# Altium PCB esp32-watch.PcbDoc
Units mil, origin at the board's own origin, x right, y up, seen from the top; angles counter-clockwise.
Board outline 1563.97 x 1611.96 mil, 4 copper layers (Top Layer, power, GND, Bottom Layer), stack 23.756 mil thick; 44 components, 28 nets, 174 pads, 123 vias.
Unrouted connection lines stored in the file: 28.
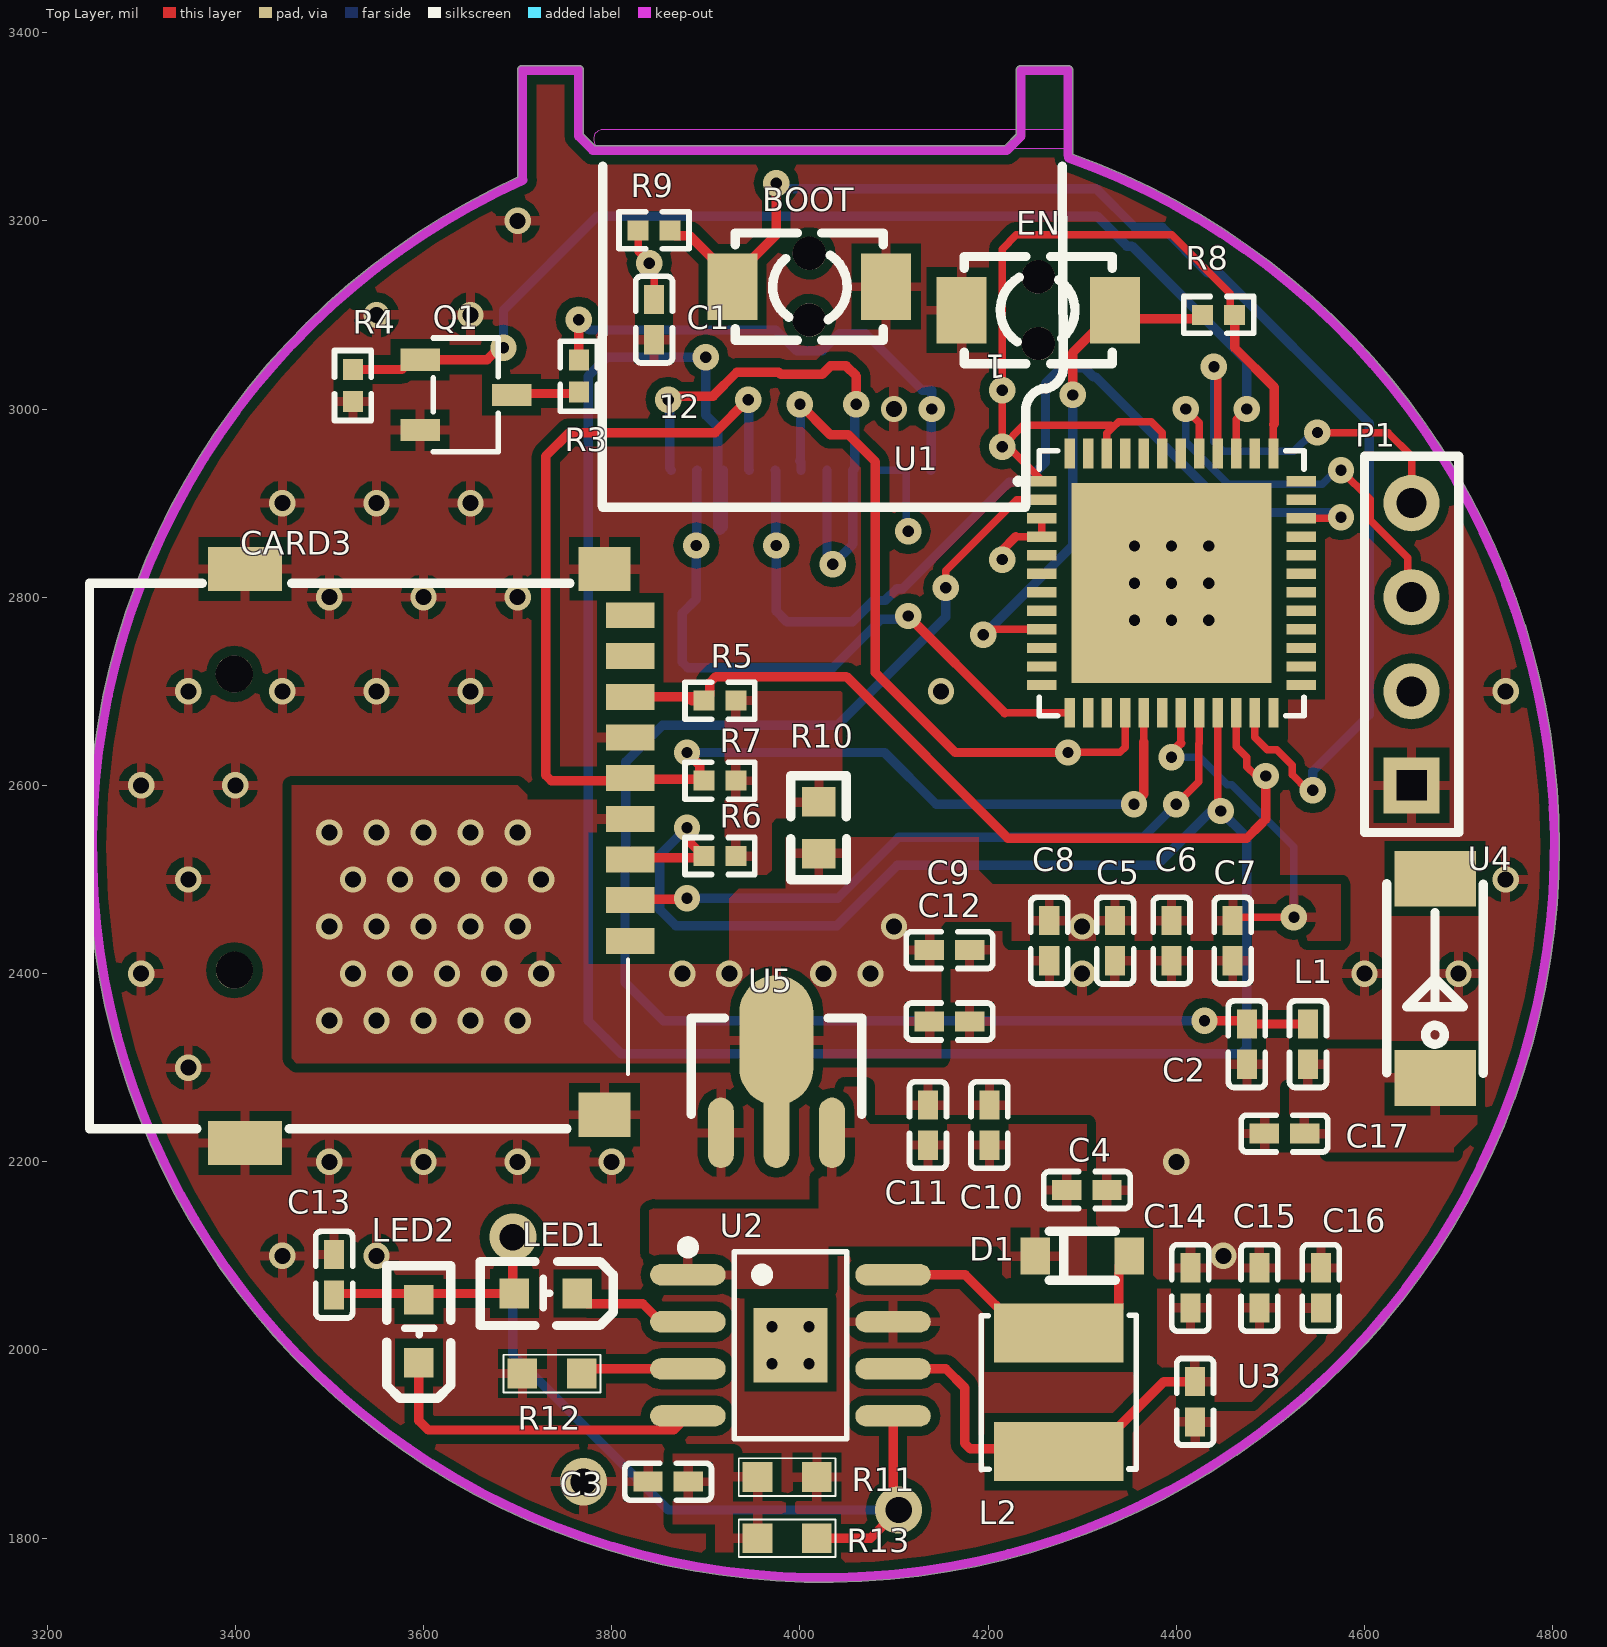
[diagram p0: Top Layer view]
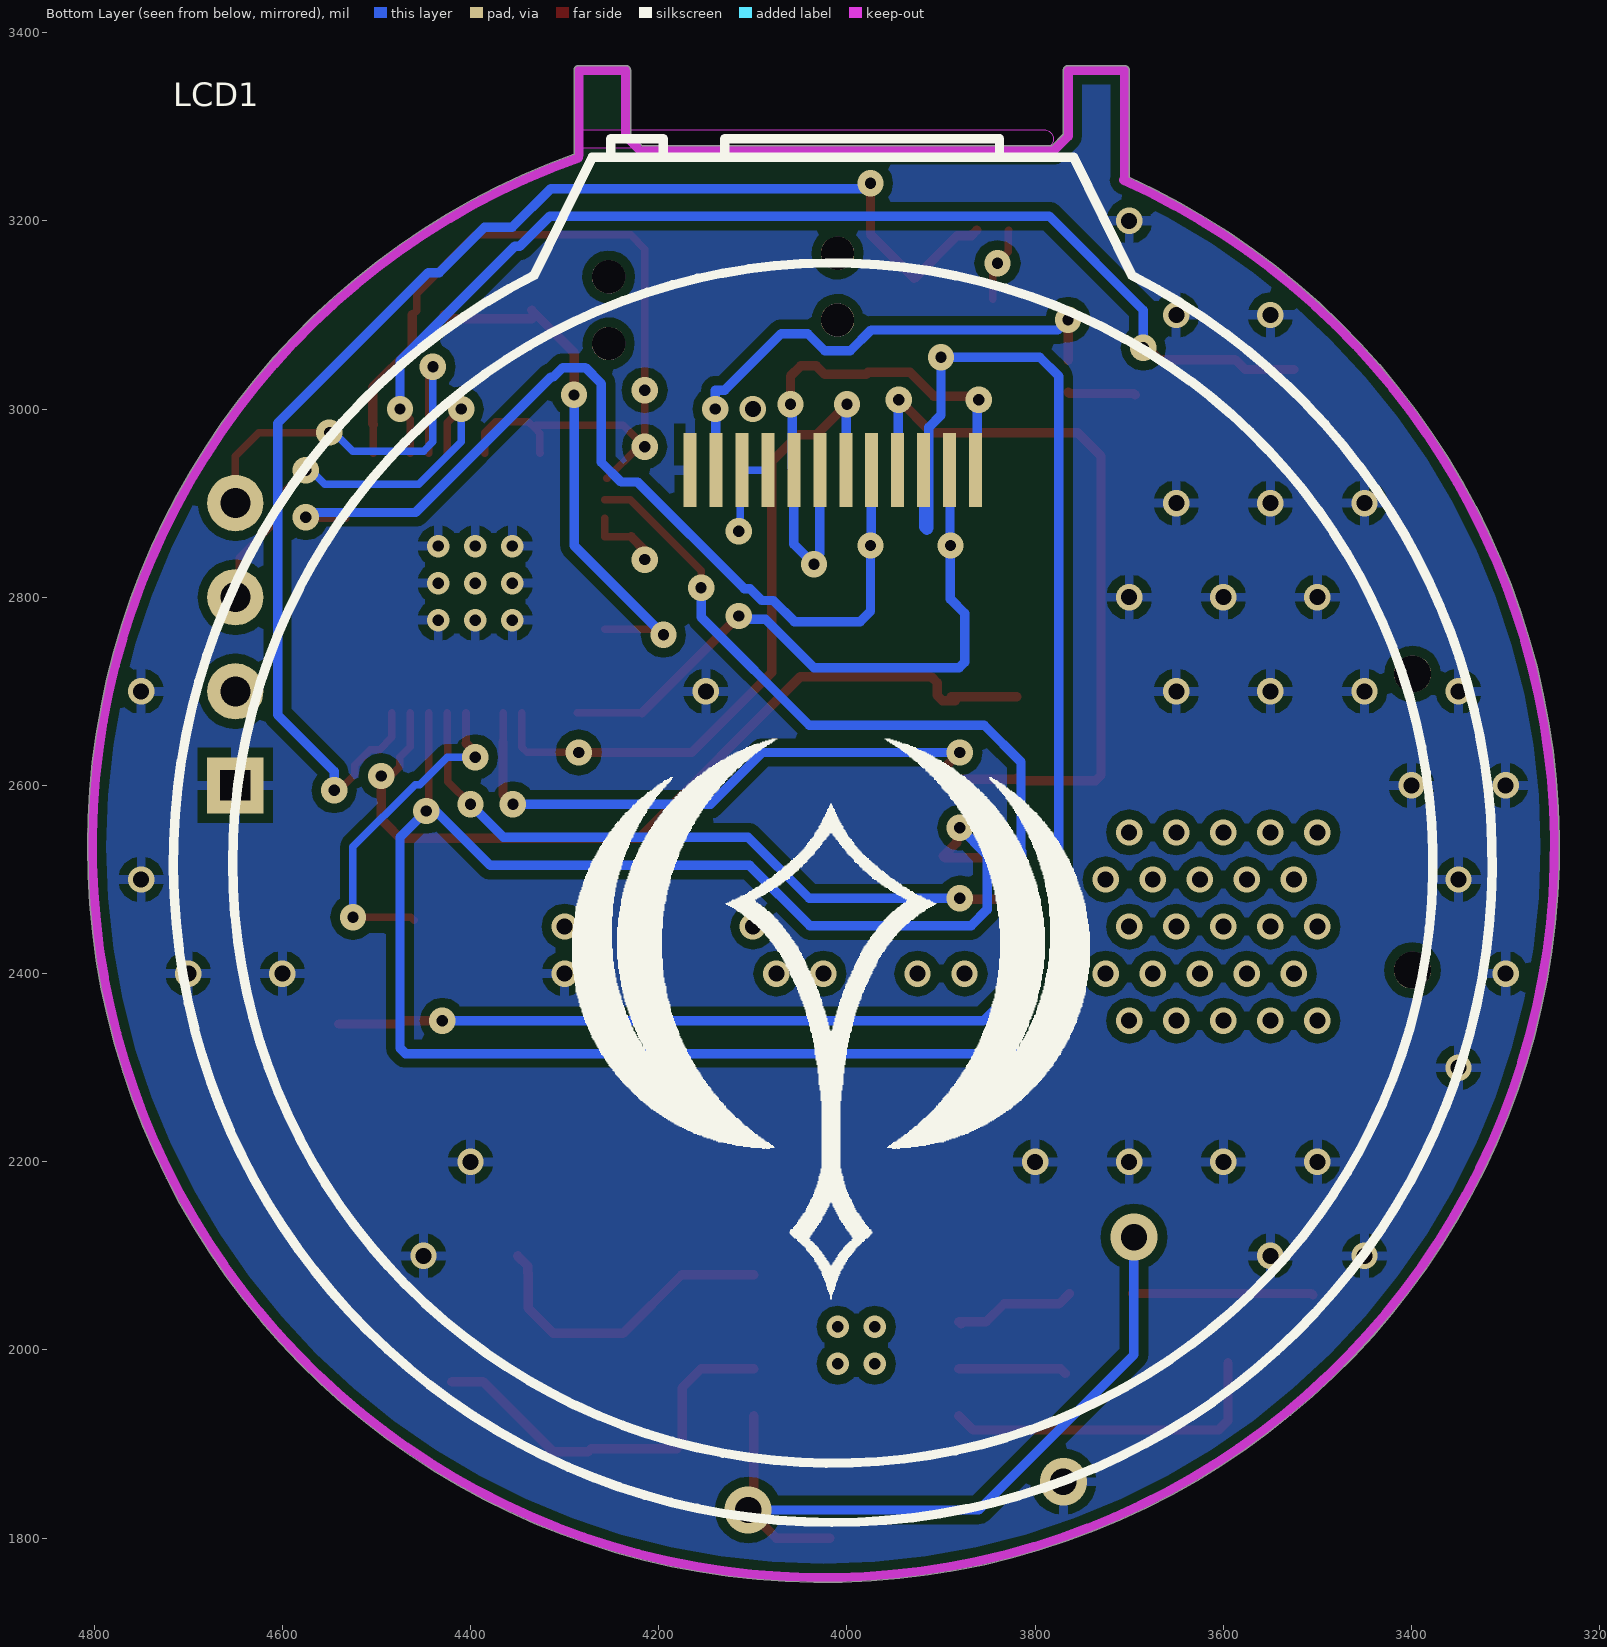
[diagram p1: Bottom Layer view, seen from below]
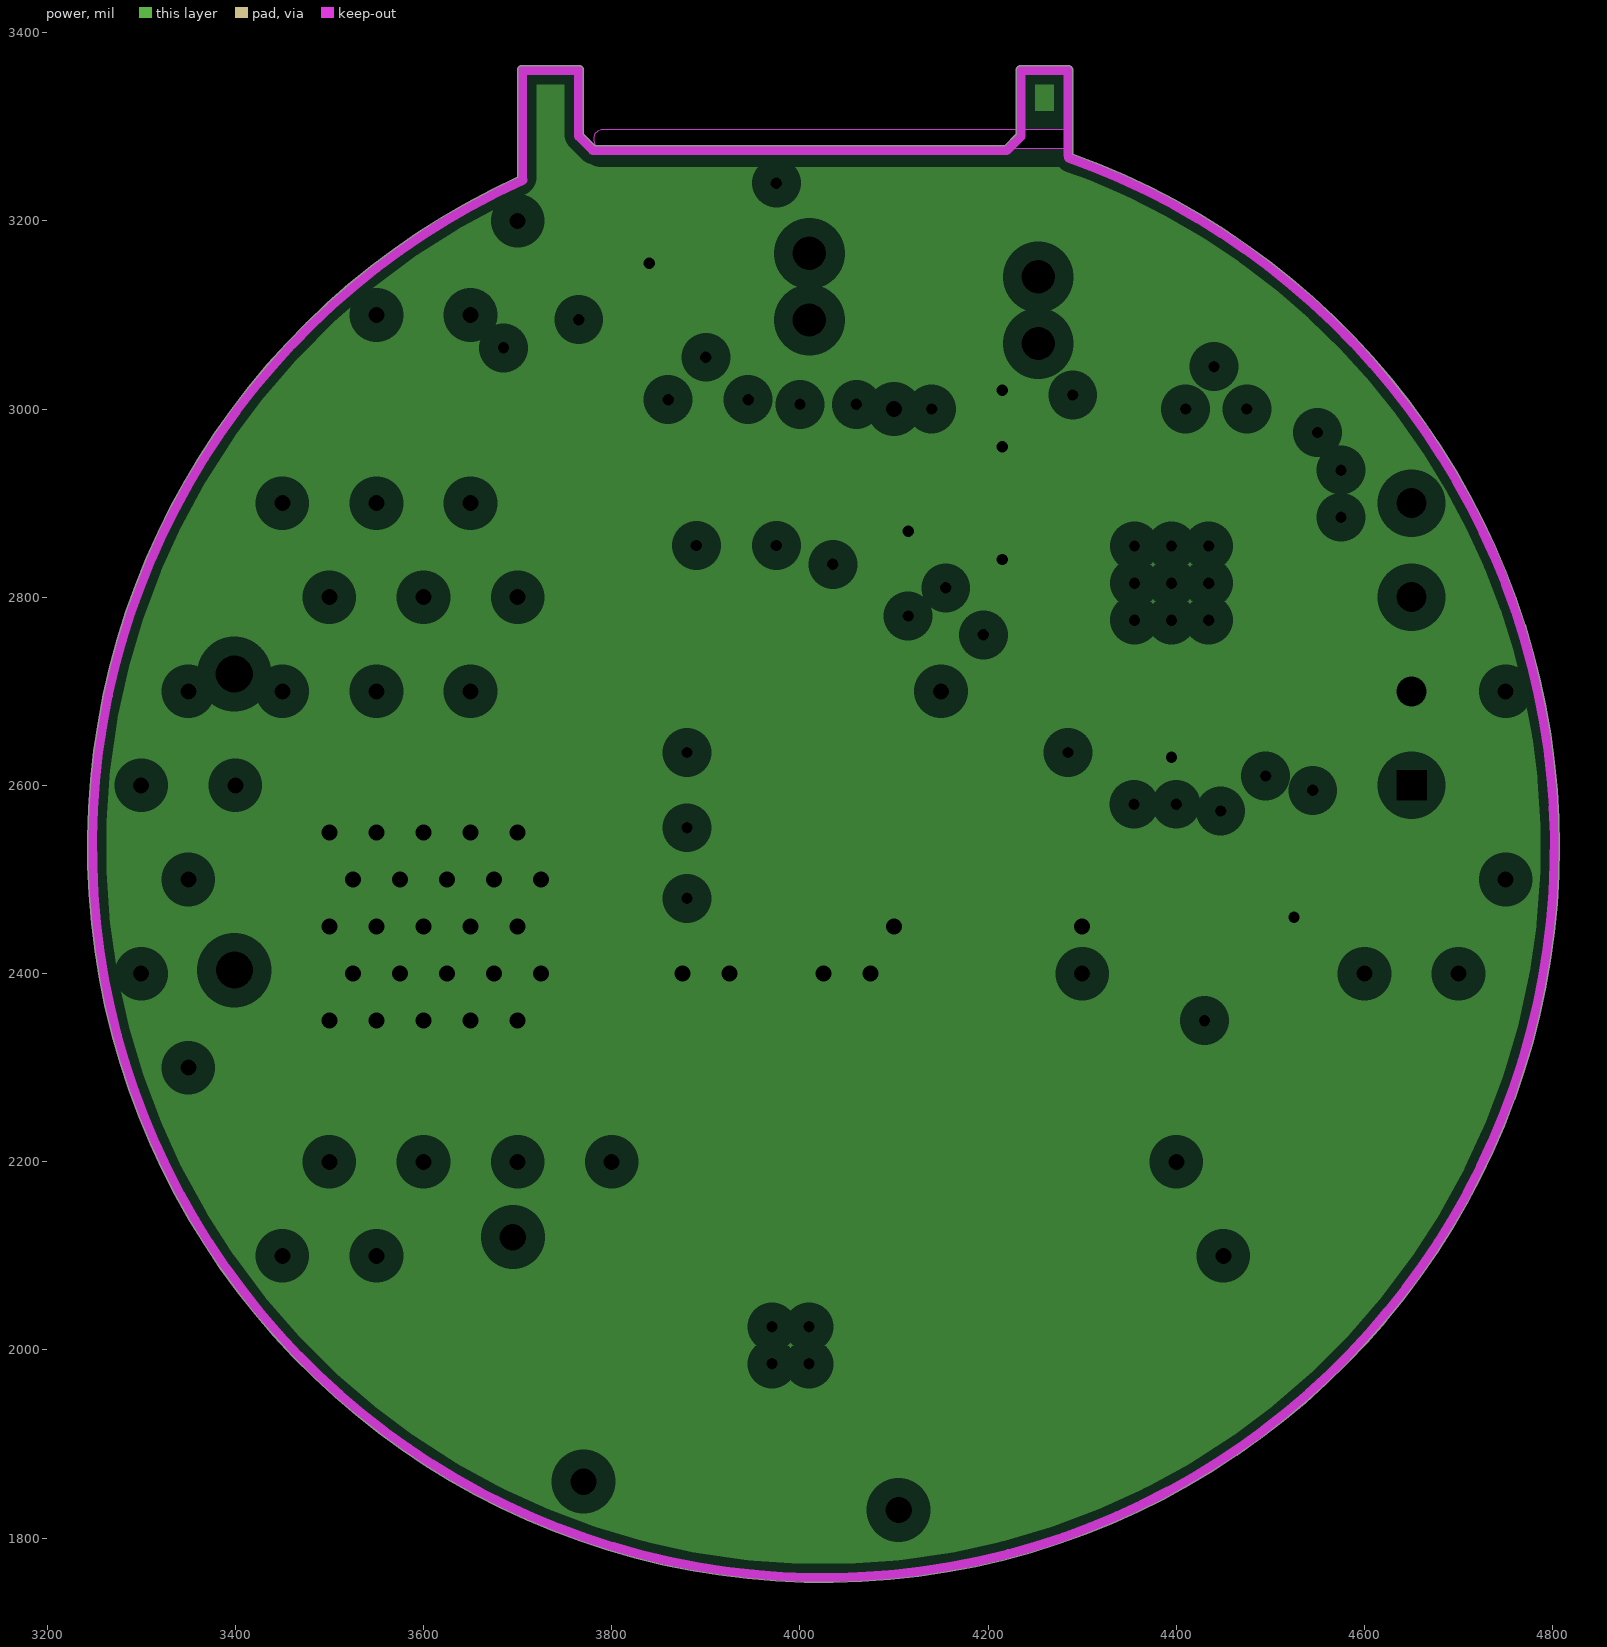
[diagram p2: power, clearances drawn from the general rule]
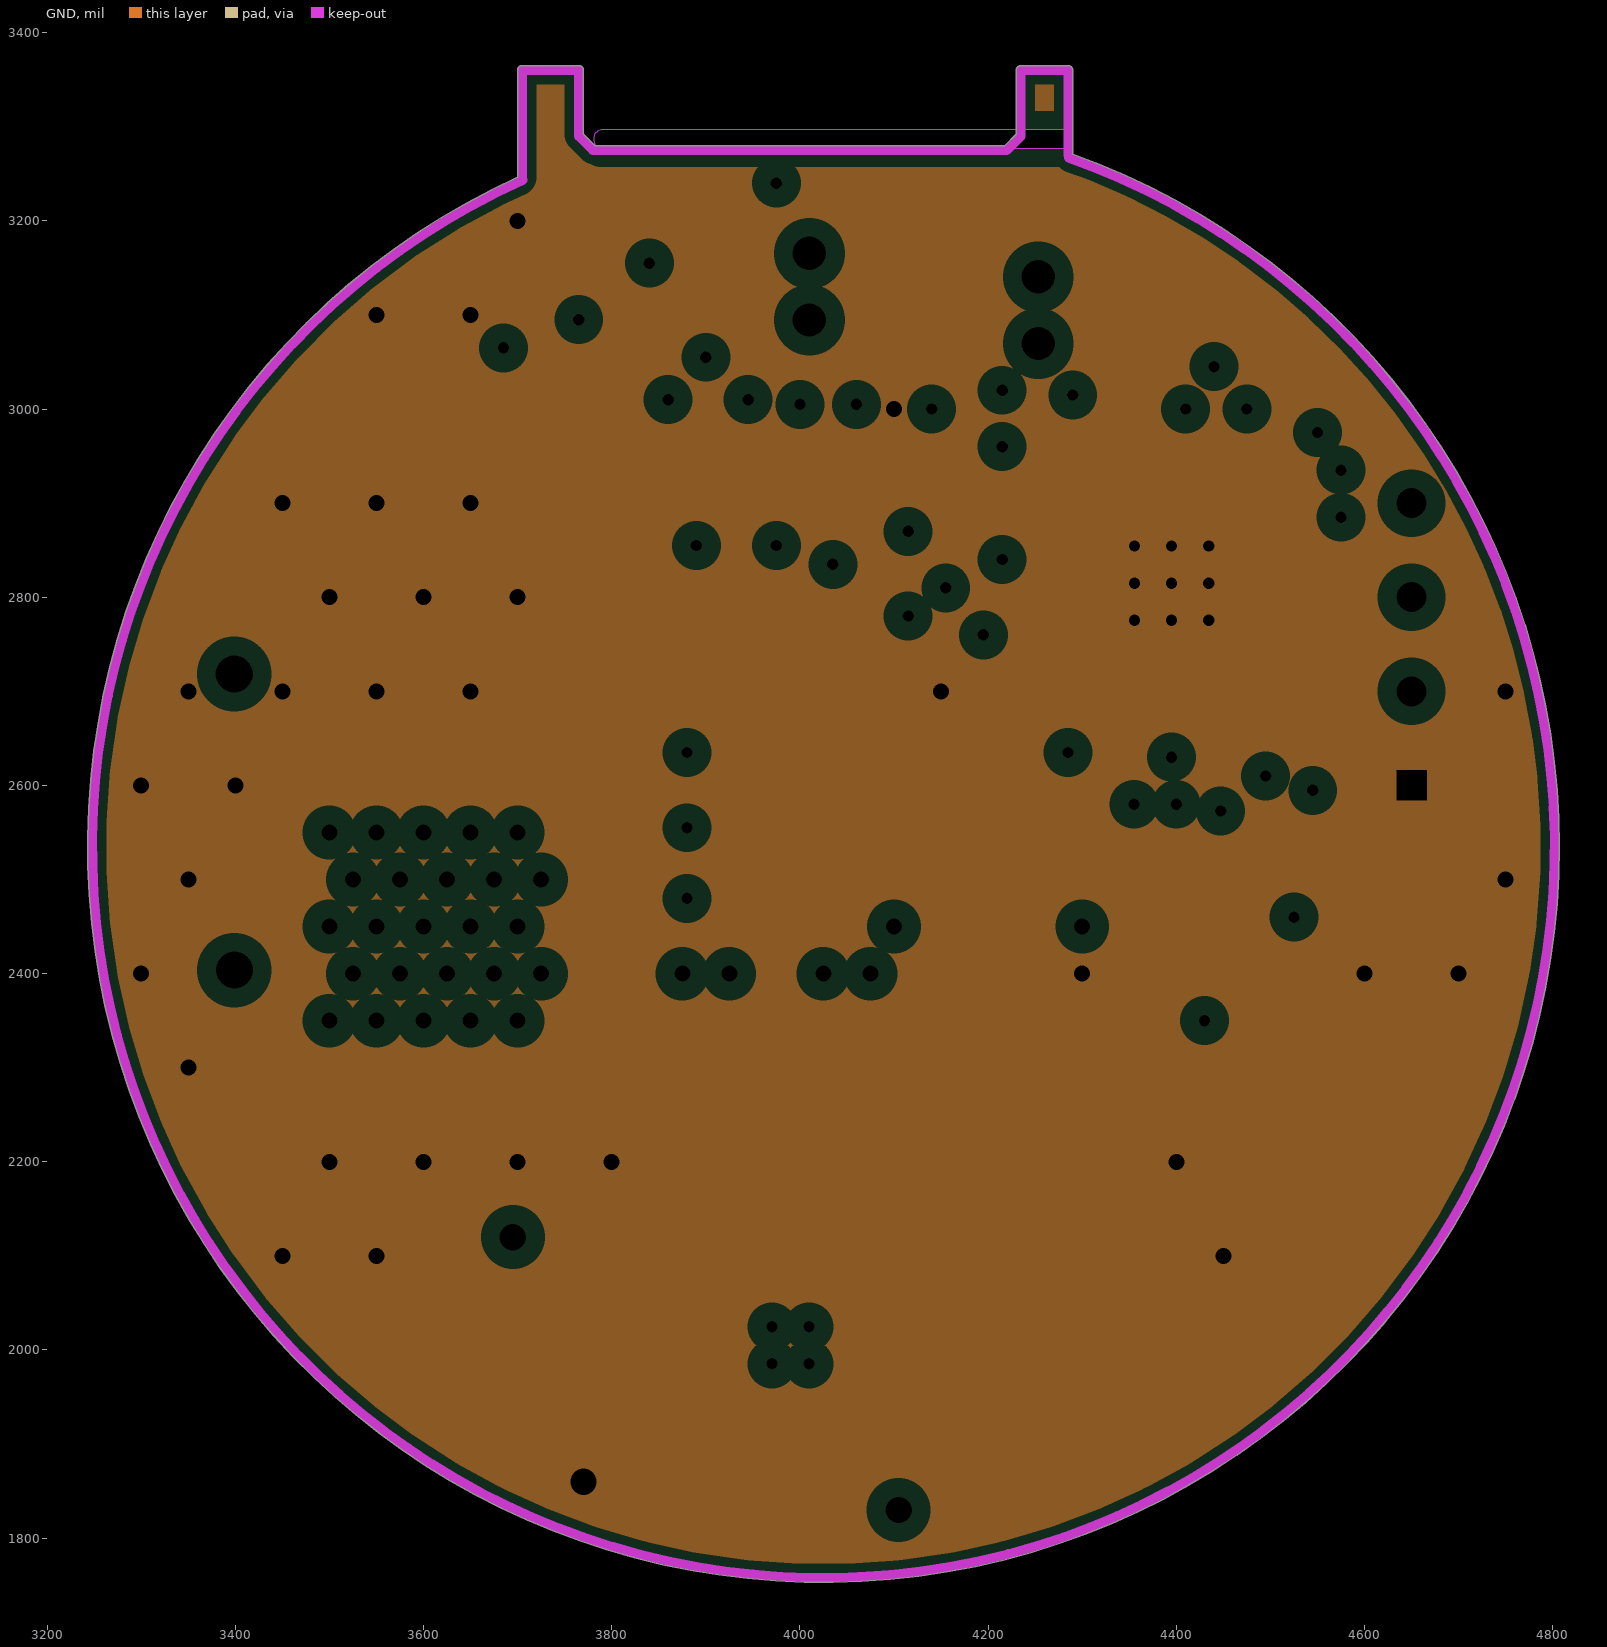
[diagram p3: GND, clearances drawn from the general rule]

## Layer stack, top to bottom
Top Solder: solder mask 0.4, Solder Resist, Dk 3.5
Top Layer: signal copper 1.4
Dielectric 2: prepreg 2.8, PP-006, Dk 4.1
power: plane copper 1.378, net 3.3V
Dielectric 1: dielectric 12.6, FR-4, Dk 4.8
GND: plane copper 1.378, net GND
Dielectric 3: prepreg 2.8, PP-006, Dk 4.1
Bottom Layer: signal copper 1.4
Bottom Solder: solder mask 0.4, Solder Resist, Dk 3.5

## Board outline
3699.99,3246.28 3699.99,3360 cw(c3705,3360) 3705,3365.01 3765,3365.01 cw(c3765,3360) 3770.01,3360 3770.01,3292.08 3782.08,3280.01 4217.92,3280.01 4229.98,3292.08 4229.98,3360 cw(c4235,3360) 4235,3365.01 4285,3365.01 cw(c4285,3360) 4290.02,3360 4290.02,3270.74 cw(c4025,2535) 4807.02,2535 cw(c4025,2535)

## Design rules (kind name [scope] priority, off if disabled: settings)
Clearance [All] p1: gap=10 ignorepadtopadclearanceinfootprint=TRUE except(0: Arc-Hole Track-Hole SMDPad-Hole THPad-Hole Via-Hole Fill-Hole Poly-Hole Region-Hole Text-Hole)
PlaneClearance [All] p1: clearance=20
PlaneConnect [All] p1: planeconnectstyle=Relief reliefexpansion=20 reliefentries=4 reliefconductorwidth=10 reliefairgap=10
PolygonConnect [All] p1: connectstyle=Relief reliefconductorwidth=10 reliefentries=4 polygonreliefangle="90 Angle" airgapwidth=10
RoutingVias [All] p1: holewidth=28 width=50 viastyle="Through Hole" minholewidth=28 minwidth=50 maxholewidth=28 maxwidth=50
SolderMaskExpansion [All] p1: expansion=4
Width [All] p1: maxlimit=50 minlimit=5 preferedwidth=8
28 further rules are at their usual default settings.

## Components (designator, comment, footprint, x,y, rotation, side; value= is the part's Value field where it differs from the comment)
BOOT "SW2" SW-SMD_L4.0-W2.9-P4.15-EH 4010,3130 r0 top
C1 "100nF" C0402 3845,3095 r270 top
C2 "2pF" C0402 4475,2325 r90 top
C3 "C0402" C0402 3860,1860 r0 top value=0.1UF
C4 "100NF" C0402 4305,2170 r180 top
C5 "100nf" C0402 4335,2435 r90 top
C6 "10nf" C0402 4395,2435 r90 top
C7 "100nf" C0402 4460,2435 r90 top
C8 "100nf" C0402 4265,2435 r90 top
C9 "C0402" C0402 4159.01,2425 r180 top value=10uf
C10 "C0402" C0402 4201.42,2239.01 r270 top value=0.1UF
C11 "C0402" C0402 4136.16,2239.01 r270 top value=10uf
C12 "C0402" C0402 4159.01,2349.1 r180 top value=0.1UF
C13 "C0603" C0402 3505,2080 r270 top
C14 "100NF" C0402 4415,2065.99 r90 top
C15 "22UF" C0402 4488.37,2065.99 r90 top
C16 "22UF" C0402 4553.63,2065.99 r90 top
C17 "2pF" C0402 4515,2230 r0 top
CARD3 "TF-01A" TF-SMD_TF-01A 3615,2525 r90 top
D1 "1N5819" SOD-323 4300,2100 r0 top
EN "SW1" SW-SMD_L4.0-W2.9-P4.15-EH 4253.31,3105 r180 top
L1 "2.4nH" C0402 4540,2325 r270 top
L2 "10uH" IND-SMD_L4.0-W4.0 4275,1955 r90 top
LCD1 "TFT_1.28_GC9A01_CB1.6" TFT_1.28_GC9A01_CB0.8 4015,2517.44 r0 bottom
LED1 "BLUE" LED0603-R-RD 3730,2060 r180 top
LED2 "BLUE" LED0603-R-RD 3595,2020 r90 top
P1 "2.54-1*4P_JX" 2.54-1*4P_TIGHT_JX 4650,2750 r90 top
Q1 "AO3400A" SOT-23-3_L2.9-W1.6-P1.90-LS2.8-BR 3645,3015 r0 top
R3 "10Ω" R0402 3765,3035 r270 top
R4 "10K" R0402 3525,3025 r270 top
R5 "10K" R0402 3915,2690 r180 top
R6 "10K" R0402 3915,2525 r180 top
R7 "10K" R0402 3915,2605 r180 top
R8 "12K" R0402 4445,3100 r0 top
R9 "12K" R0402 3845,3190 r0 top
R10 "0Ω" R0603 4020,2555 r270 top
R11 "R0603" R_0603 4017.99,1865 r180 top value=无?
R12 "R0603" R_0603 3705,1975 r0 top value=2K
R13 "R0603" R_0603 3955,1800 r0 top value=0.3R
U1 "ESP32-PICO-D4" QFN-48_L7.0-W7.0-P0.50-BL-EP5.4 4395,2814.99 r270 top
U2 "TP5400" SOIC-8_L5.0-W4.0-P1.27-LS6.0-BL-EP2.0 3990,2005 r270 top
U3 "BAT" C0402 4420,1945 r270 top
U4 "CA-C03" ANT2051 4675,2395 r90 top
U5 "AMS1117-3.3_C347256" SOT-89_L4.5-W2.5-P1.50-LS4.2-BR 3975,2280 r270 top

## Footprints (in the part's own frame and the unit in brackets; to place one, negate y for a bottom-side part, rotate by r counter-clockwise, add the part's x,y. Pads: shape width x height; smd on the part's side, far side on the other; paste and mask are expansions set on the pad)
2.54-1*4P_TIGHT_JX [mm]
  rect 1.52x1.52 hole 0.81 square: 1(-3.81,0)
  round 1.52 hole 0.81: 2(-1.27,0) 3(1.27,0) 4(3.81,0)
  silkscreen extent -5.08,-1.27 5.08,1.27
ANT2051 [mm]
  rect 1.5x2.2 smd: 1(-2.69,0) 2(2.69,0)
  silkscreen extent -2.56,-1.3 2.55,1.3
C0402 [mm]
  rect 0.79x0.54 smd: 1(-0.545,0) 2(0.545,0)
  silkscreen extent -1.17,-0.5 1.17,0.5
IND-SMD_L4.0-W4.0 [mm]
  rect 1.6x3.5 smd: 1(-1.6,0) 2(1.6,0)
  silkscreen extent -2.08,-2.1 2.08,2.1
LED0603-R-RD [mm]
  rect 0.8x0.8 smd: 1(0.851,0) 2(-0.851,0)
  silkscreen extent -1.82,-0.86 1.77,0.86
QFN-48_L7.0-W7.0-P0.50-BL-EP5.4 [mm]
  rect 0.28x0.8 smd: 1(-2.75,-3.5) 2(-2.25,-3.5) 3(-1.75,-3.5) 4(-1.25,-3.5) 5(-0.75,-3.5) 6(-0.25,-3.5) 7(0.25,-3.5) 8(0.75,-3.5) 9(1.25,-3.5) 10(1.75,-3.5) 11(2.25,-3.5) 12(2.75,-3.5) 25(2.75,3.5) 26(2.25,3.5) 27(1.75,3.5) 28(1.25,3.5) 29(0.75,3.5) 30(0.25,3.5) 31(-0.25,3.5) 32(-0.75,3.5) 33(-1.25,3.5) 34(-1.75,3.5) 35(-2.25,3.5) 36(-2.75,3.5)
  rect 0.8x0.28 smd: 13(3.5,-2.75) 14(3.5,-2.25) 15(3.5,-1.75) 16(3.5,-1.25) 17(3.5,-0.75) 18(3.5,-0.25) 19(3.5,0.25) 20(3.5,0.75) 21(3.5,1.25) 22(3.5,1.75) 23(3.5,2.25) 24(3.5,2.75) 37(-3.5,2.75) 38(-3.5,2.25) 39(-3.5,1.75) 40(-3.5,1.25) 41(-3.5,0.75) 42(-3.5,0.25) 43(-3.5,-0.25) 44(-3.5,-0.75) 45(-3.5,-1.25) 46(-3.5,-1.75) 47(-3.5,-2.25) 48(-3.5,-2.75)
  rect 5.4x5.4 smd: 49(0,0)
  silkscreen extent -3.58,-4.21 3.58,3.58
R0402 [mm]
  rect 0.566x0.54 smd: 1(-0.433,0) 2(0.433,0)
  silkscreen extent -0.94,-0.5 0.94,0.5
R0603 [mm]
  rect 0.8x0.9 smd: 1(0.7,0) 2(-0.7,0)
  silkscreen extent -1.4,-0.76 1.4,0.75
R_0603 [mm]
  rect 0.8x0.8 smd: 1(0,0) 2(1.6,0)
  silkscreen extent -0.51,-0.51 2.11,0.51
SOD-323 [mm]
  rect 0.8x1 smd: 1(1.27,0) 2(-1.27,0)
  silkscreen extent -0.89,-0.66 0.89,0.66
SOIC-8_L5.0-W4.0-P1.27-LS6.0-BL-EP2.0 [mm]
  oval 0.574x2.038 smd: 1(-1.905,-2.769) 2(-0.635,-2.769) 3(0.635,-2.769) 4(1.905,-2.769) 5(1.905,2.769) 6(0.635,2.769) 7(-0.635,2.769) 8(-1.905,2.769)
  rect 2x2 smd: 9(0,0)
  silkscreen extent -2.79,-2.92 2.53,1.52
SOT-23-3_L2.9-W1.6-P1.90-LS2.8-BR [mm]
  rect 1.07x0.6 smd: 1(-1.235,0.95) 2(-1.235,-0.95) 3(1.235,0)
  silkscreen extent -0.88,-1.54 0.88,1.54
SOT-89_L4.5-W2.5-P1.50-LS4.2-BR [mm]
  oval 1.9x0.7 smd: 1(1.25,-1.5) 3(1.25,1.5)
  oval 3.5x2 smd: 2(-1.25,0)
  oval 2.1x0.7 smd: 2(1.151,0)
  silkscreen extent -1.85,-2.3 0.75,2.3
SW-SMD_L4.0-W2.9-P4.15-EH [mm]
  rect 1.35x1.8 smd: 1(2.075,0) 2(-2.075,0)
  round 0.9 hole 0.9 unplated: ""(0,-0.9) ""(0,0.9)
  silkscreen extent -2,-1.45 2,1.45
TF-SMD_TF-01A [mm]
  rect 0.7x1.3 smd: 1(-2.292,-5.2) 2(-1.192,-5.198) 3(-0.096,-5.2) 4(1.004,-5.2) 5(2.103,-5.2) 6(3.201,-5.2) 7(4.297,-5.2) 8(5.395,-5.2) 9(6.499,-5.2)
  rect 1.2x1.397 smd: 10(7.747,-4.502) 13(-6.985,-4.502)
  rect 1.2x2 smd: 11(7.747,5.2) 12(-7.747,5.2)
  round 1 hole 1 unplated: ""(-3.084,5.487) ""(4.915,5.49)
  silkscreen extent -7.37,-5.14 7.37,9.4
TFT_1.28_GC9A01_CB0.8 [mm]
  rect 0.35x2 smd: 1(3.85,-10.61) 2(3.15,-10.61) 3(2.45,-10.61) 4(1.75,-10.61) 5(1.05,-10.61) 6(0.35,-10.61) 7(-0.35,-10.61) 8(-1.05,-10.61) 9(-1.75,-10.61) 10(-2.45,-10.61) 11(-3.15,-10.61) 12(-3.85,-10.61)
  Keep-Out Layer board cut-out: -5.7,-19.3 6.7,-19.3 6.75,-19.3 6.842,-19.338 6.912,-19.408 6.95,-19.5 6.95,-19.6 6.912,-19.692 6.842,-19.762 6.75,-19.8 6.7,-19.8 6.7,-19.8 -5.7,-19.8 -5.75,-19.8 -5.842,-19.762 -5.912,-19.692 -5.95,-19.6 -5.95,-19.5 -5.912,-19.408 -5.842,-19.338 -5.75,-19.3 -5.7,-19.3 -5.7,-19.3
  silkscreen extent -17.8,-19.56 17.8,17.8

## Part data
BOOT EN: BOM_JLCPCB Part Class="Extended Part", BOM_Manufacturer=BRIGHT, BOM_Manufacturer Part=TSA343G00D-250J2, BOM_Supplier=LCSC, BOM_Supplier Part=C354947, Contributor=LCSC, spicePre=S, spiceSymbolName=TSA343G00D-250J2
C1: BOM_JLCPCB Part Class="Extended Part", BOM_Manufacturer=YAGEO, BOM_Manufacturer Part=CC0402KRX5R9BB104, BOM_Supplier=LCSC, BOM_Supplier Part=C105882, nameAlias=Capacitance, spicePre=C, spiceSymbolName=CC0402KRX5R9BB104
C4 C14 C15 C16: library part C0805, "Capacitor"
C5 C7 C8: library part 10uF, BOM_JLCPCB Part Class="Basic Part", BOM_Manufacturer=SAMSUNG, BOM_Manufacturer Part=CL05A106MQ5NUNC, BOM_Supplier=LCSC, BOM_Supplier Part=C15525, nameAlias=Capacitance, spicePre=C, spiceSymbolName=CL05A106MQ5NUNC
C6: library part 10uF, BOM_JLCPCB Part Class="Basic Part", BOM_Manufacturer=SAMSUNG, BOM_Manufacturer Part=CL05A106MQ5NUNC, Package Display=No, BOM_Supplier=LCSC, BOM_Supplier Part=C15525, nameAlias=Capacitance, spicePre=C, spiceSymbolName=CL05A106MQ5NUNC
C13: BOM_Manufacturer="Samsung Electro-Mechanics", BOM_Manufacturer Part=10uF, BOM_Supplier=LCSC, BOM_Supplier Part=C15415, Contributor=LCSC, nameAlias=Value, spicePre=C, spiceSymbolName=10UF
CARD3: BOM_JLCPCB Part Class="Extended Part", BOM_Manufacturer=HRO, BOM_Manufacturer Part=TF-01A, BOM_Supplier=LCSC, BOM_Supplier Part=C91145, spicePre=C, spiceSymbolName=TF-01A
D1: "肖特基二极管"
L2: BOM_JLCPCB Part Class="Extended Part", BOM_Manufacturer=Sunlord, BOM_Manufacturer Part=SWPA4030S100MT, BOM_Supplier=LCSC, BOM_Supplier Part=C38117, nameAlias=Inductance, spicePre=L, spiceSymbolName=SWPA4030S100MT
LED1 LED2: library part LED_B
Q1: BOM_JLCPCB Part Class="Basic Part", BOM_Manufacturer=AOS, BOM_Manufacturer Part=AO3400A, BOM_Supplier=LCSC, BOM_Supplier Part=C20917, spicePre=Q, spiceSymbolName=AO3400A
R3: BOM_JLCPCB Part Class="Basic Part", BOM_Manufacturer=UniOhm, BOM_Manufacturer Part=0402WGF100JTCE, Resistance (Ohms)=10, BOM_Supplier=LCSC, BOM_Supplier Part=C25077, nameAlias=Resistance, spicePre=R, spiceSymbolName=0402WGF100JTCE
R4 R5 R6 R7: BOM_JLCPCB Part Class="Basic Part", BOM_Manufacturer=UniOhm, BOM_Manufacturer Part=0402WGF1002TCE, BOM_Supplier=LCSC, BOM_Supplier Part=C25744, nameAlias="Resistance (Ohms)", spicePre=R, spiceSymbolName=0402WGF1002TCE
R8 R9: BOM_JLCPCB Part Class="Extended Part", BOM_Manufacturer=YAGEO, BOM_Manufacturer Part=AC0402JR-0712KL, Resistance=12kΩ, BOM_Supplier=LCSC, BOM_Supplier Part=C227297, Contributor=LCSC, nameAlias="Resistance (Ohms)", spicePre=R, spiceSymbolName=AC0402JR-0712KL
R10: BOM_JLCPCB Part Class="Extended Part", BOM_Manufacturer=UniOhm, BOM_Manufacturer Part=0603WAJ0000T5E, Resistance (Ohms)=0, BOM_Supplier=LCSC, BOM_Supplier Part=C15402, nameAlias=Resistance, spicePre=R, spiceSymbolName=0603WAJ0000T5E
U1: BOM_JLCPCB Part Class="Extended Part", BOM_Manufacturer="Espressif Systems", Package Display=No, BOM_Manufacturer Part=ESP32-PICO-D4, BOM_Supplier=LCSC, BOM_Supplier Part=C193707, Contributor=LCSC, spicePre=U, spiceSymbolName=ESP32-PICO-D4
U2: "锂电池充放电", BOM_JLCPCB Part Class="Extended Part", BOM_Manufacturer=TOPPOWER, BOM_Manufacturer Part=TP5400, BOM_Supplier=LCSC, BOM_Supplier Part=C24154, spicePre=U, spiceSymbolName=TP5400
U5: BOM_JLCPCB Part Class="Extended Part", BOM_Manufacturer="Youtai Semiconductor Co., Ltd.", BOM_Manufacturer Part=AMS1117-3.3, BOM_Supplier=LCSC, BOM_Supplier Part=C347256, Contributor=LCSC, spicePre=U, spiceSymbolName=AMS1117-3.3_C347256
C2 C17: Contributor=LCEDA_Lib, nameAlias=Value(F), spicePre=C, spiceSymbolName=C_0402_US
C3 C9 C10 C11 C12: PCB DECAL=CAP_0603_FIRE
L1: Contributor=LCEDA_Lib, nameAlias=Value(H), spicePre=L, spiceSymbolName=L0402_US
LCD1: Contributor=启?, spicePre=L, spiceSymbolName=TFT_1.28_GC9A01_CB1.6
P1: BOM_Supplier=LCSC, BOM_Supplier Part=C115245, spicePre=P, spiceSymbolName=2.54-1*4P_JX
R11 R12 R13: PCB DECAL=R_0603
U4: Contributor=BVREAVE, link=https://item.taobao.com/item.htm?spm=a230r.1.14.4.81c453c0MSMjjx&id=627328734225&ns=1&abbucket=1#detail, spicePre=U, spiceSymbolName=ANT_CrossAir_CA-C03

## Via types
v1: diameter 28, hole 17, Top Layer to Bottom Layer, 68 vias
v2: diameter 28, hole 12, Top Layer to Bottom Layer, 39 vias
v3: diameter 24.02, hole 12, Top Layer to Bottom Layer, 9 vias
v4: diameter 24, hole 12, Top Layer to Bottom Layer, 4 vias
v5: diameter 50, hole 28, Top Layer to Bottom Layer, 3 vias

## Nets (pads, with @x,y where several pads share a name; then routed paths per layer and width w, separated by ;. In a path a pad name is that pad's centre, name@x,y a point inside that pad or via, vN(x,y) a via of type N, cw(c..) or ccw(c..) an arc to the next point about the centre after c; other vN are vias at no path point)
3.3V: C1.1 C5.2 C6.2 C7.2 C8.2 C9.2 C12.2 CARD3.4 LCD1.3 LCD1.4 P1.2 R8.2 R9.1 R10.1 U1.1 U1.3 U1.4 U1.19 U1.37 U1.43 U1.46 U5.2 | length 1582.5
  Top Layer w8: R9.1 3828.37,3189.59 3828.37,3167.37 3845,3150.74 C1.1 ; v2@4221.28,2960 U1.1@4255,2926.28 ; 4229.2,2864.2 U1.4 U1.3 ; U1.46 4326.28,2952.97 4326.28,2974.34 4332.46,2980.51 ; U1.43 4384.99,2952.97 4384.99,2975.01 4373.31,2986.69 4338.63,2986.69 4332.46,2980.51 ; 4404.85,2644.72 U1.19 ; C7.2 4463.54,2460 v2(4525,2460) ; R8.2 4457.37,3104.67 4457.37,3122.63 4395,3185 4230,3185 4215,3170 v2(4215,3020) v2(4215,2960) 4237.54,2982.54 4330.43,2982.54 4332.46,2980.51 ; U1.37 4503.27,2983.53
  Top Layer w10: v2(4215,2840) 4215,2850 4229.2,2864.2 ; v2(4215,2960) v2@4221.28,2960 ; v2(4395,2630) 4395,2634.87 4404.85,2644.72 ; R8.2 4462.04,3065.23 4504,3023.27 4504,2984.26 4503.27,2983.53
  Bottom Layer w8: LCD1.4 LCD1.3 4113.23,2933.38 4113.23,2871.77 v2(4115,2870) ; v2(4395,2630) 4425,2630 4454.11,2600.89 4458.71,2600.89 4525,2534.6 v2(4525,2460)
  other v1: 3500,2350 3550,2350 3600,2350 3650,2350 3700,2350 3700,2350 3525,2400 3575,2400 3625,2400 3675,2400 3725,2400 3875,2400 3925,2400 4025,2400 4025,2400 4075,2400 4075,2400 3500,2450 3550,2450 3600,2450 3650,2450 3700,2450 4100,2450 4300,2450 4300,2450 3525,2500 3575,2500 3625,2500 3675,2500 3725,2500 3500,2550 3550,2550 3600,2550 3650,2550 3700,2550
  other v2: 3840,3155
5V: C3.2 R11.2 R13.1
+5.0V: C4.2 C10.2 C11.2 D1.2 U2.1 U5.3
GND: BOOT.1 C1.2 C2.1 C3.1 C4.1 C5.1 C6.1 C7.1 C8.1 C9.1 C10.1 C11.1 C12.1 C13.1 C14.2 C15.2 C16.2 C17.1 CARD3.6 CARD3.10 CARD3.11 CARD3.12 CARD3.13 EN.1 LCD1.1 P1.1 Q1.2 R4.2 R11.1 R12.1 U1.49 U2.7 U3.2 U5.1
  other v1: 3450,2100 3550,2100 4450,2100 3500,2200 3600,2200 3700,2200 3800,2200 4400,2200 3350,2300 3300,2400 4300,2400 4600,2400 4700,2400 3350,2500 4750,2500 3300,2600 3400,2600 3350,2700 3450,2700 3550,2700 3650,2700 4150,2700 4750,2700 3500,2800 3600,2800 3700,2800 3450,2900 3550,2900 3650,2900 4100,3000 3550,3100 3650,3100 3700,3200
  other v3: 4355.62,2775.63 4395,2775.63 4434.37,2775.62 4355.62,2815 4395,2815 4434.37,2815 4355.62,2854.37 4395,2854.37 4434.37,2854.36
  other v5: 3770,1860
NetBOOT_2: BOOT.2 R9.2 U1.23 | length 1480.6
  Top Layer w8: U1.23 4483.59,2651.01 4496.6,2638 4506.6,2638 4523,2621.6 4523,2611.6 4539.8,2594.8 v2(4545,2594.8)
  Top Layer w10: R9.2 3867.67,3184.37 3882.79,3184.37 3928.31,3138.86 3975,3185.55 v2(3975,3240) ; v2(4545,2594.8) v2@4550.2,2594.8
  Bottom Layer w10: v2(3975,3240) 3980.7,3234.3 4314.66,3234.3 4355.8,3193.15 4385.14,3193.15 4433.28,3145 4445,3145 4605.08,2984.92 4605.08,2675.08 4545,2615 v2(4545,2594.8)
NetC2_2: C2.2 L1.1 U1.2 | length 1565.2
  Top Layer w8: v2(4155,2810) 4155,2828.29 4230.29,2903.57 U1.2
  Top Layer w10: v2(4430,2350) 4471.46,2350 C2.2 L1.1
  Bottom Layer w10: v2(4155,2810) 4155,2778.99 4040.01,2664 3854,2664 3815,2625 3815,2531.01 3814.14,2530.15 3814.14,2390.86 3855,2350 v2(4430,2350)
NetC13_2: C13.2 LED1.1 LED2.1 R13.2 U2.5 | length 1053
  Top Layer w10: C13.2 3506.46,2060 LED1.1 3695,2061.5 v5(3695,2120) ; R13.2 4075,1800 4099.02,1824.02 U2.5
  Bottom Layer w10: v5(3695,2120) 3695,1995 3860,1830 v5(4105,1830)
NetC14_1: C14.1 C15.1 C16.1 L2.1 U2.6 U3.1 | length 422.9
  Top Layer w10: U2.6 4155,1980 4175,1960 4175,1900.86 4180.86,1895 4272.01,1895 L2.1 4312.4,1892.01 4386.86,1966.46 U3.1
NetC17_2: C17.2 L1.2 U4.1
NetCARD3_2: CARD3.2 U1.20 | length 729.9
  Top Layer w8: v2(4400,2580) 4424,2604 4424,2644.05 4424.54,2644.59 U1.20
  Top Layer w10: CARD3.2 3820.62,2479.03 3879.03,2479.03 v2(3880,2480)
  Bottom Layer w10: v2(3880,2480) 4040.15,2480 4105.15,2545 4365,2545 v2(4400,2580)
NetCARD3_3: CARD3.3 LCD1.10 R6.2 U1.21 | length 3030.3
  Top Layer w8: U1.21 4444.22,2575.78 v2(4447.11,2572.89)
  Top Layer w10: CARD3.3 3821.61,2523.12 3896.08,2523.12 R6.2 3897.45,2525 3883.44,2539.01 3883.44,2551.56 v2(3880,2555)
  Bottom Layer w10: v2(3880,2555) 3851,2526 3851,2467.99 3867.99,2451 4039.43,2451 4103.43,2515 4379,2515 4436.89,2572.89 v2(4447.11,2572.89) 4475,2545 4475,2320.86 4469.14,2315 3810,2315 3775,2350 3775,3035 3795,3055 v2(3900,3055) 3900,2993.61 3912.87,2980.74 3912.87,2873.14 3915,2871.01 3918.54,2874.55 LCD1.10
NetCARD3_5: CARD3.5 LCD1.9 R7.2 U1.17 | length 1461.8
  Top Layer w8: 4365.48,2646.45 U1.17
  Top Layer w10: v2(3880,2635) 3893.44,2621.56 3893.44,2609.52 R7.2@3896.57,2606.39 ; R7.2 R7.2@3896.57,2606.39 ; v2(3945,3010) 3910,2975 3755,2975 3730,2950 3730,2610.86 3735.86,2605 3816.95,2605 CARD3.5 3821.12,2606.39 R7.2@3896.57,2606.39 ; v2(4355,2580) 4365.48,2590.48 4365.48,2646.45
  Bottom Layer w10: v2(3880,2635) 4090,2635 4145,2580 v2(4355,2580) ; v2(3945,3010) 3945.55,3009.45 3945.55,2935.71 LCD1.9
NetCARD3_7: CARD3.7 R5.2 U1.22 | length 915.3
  Top Layer w8: U1.22 4463.91,2641.09 4475,2630 4475,2620 4485,2610 v2(4495,2610)
  Top Layer w10: CARD3.7 3889.19,2694.19 3885,2690 R5.2 3898.47,2690 3904.09,2695.63 3904.09,2709.09 3910.63,2715.63 4049.37,2715.63 4221.11,2543.89 4474.9,2543.89 4490,2558.99 4495,2563.99 v2(4495,2610)
NetD1_1: D1.1 L2.2 U2.8 | length 336.7
  Top Layer w10: U2.8 4175.59,2080 4237.6,2017.99 L2.2 4312.4,2017.99 4338.9,2044.49 4338.9,2081.89 4339.25,2082.24 4339.25,2089.25 D1.1
NetEN_2: EN.2 R8.1 U1.9 | length 562.1
  Top Layer w8: v2(4195,2760) 4200.78,2765.78 U1.9
  Top Layer w10: v2(4290,3015) 4290,3060 EN.2 ; EN.2@4335,3096.14 4424.1,3096.14 R8.1
  Bottom Layer w10: v2(4195,2760) 4290,2855 v2(4290,3015)
NetLCD1_2: LCD1.2 R3.1 | length 549.3
  Top Layer w10: R3.1 v2(3765,3095)
  Bottom Layer w10: v2(3765,3095) 3776,3084 3974.3,3084 3996.45,3061.85 4023.55,3061.85 4041.7,3080 4070,3080 4130,3020 4140,3020 v2(4140,3000) 4139.51,2999.51 4139.51,2935.65 LCD1.2
NetLCD1_5: LCD1.5 LCD1.6 LCD1.12 | length 610.5
  Top Layer w10: v2(3860,3010) 3863.77,3013.77 3907.76,3013.77 3932.99,3039 3977.57,3039 3979.72,3036.85 4023.55,3036.85 4032.56,3045.86 4049.14,3045.86 4060,3035 v2(4060,3005)
  Bottom Layer w10: v2(3860,3010) 3861.71,3008.29 3861.71,2936.87 LCD1.12 ; LCD1.6 4028.78,2846.09 4035,2839.87 v2(4035,2835) 4056.34,2856.34 LCD1.5 4058.17,2936.99 4058.17,3003.17 v2(4060,3005)
NetLCD1_7: LCD1.7 U1.16 | length 740
  Top Layer w8: v2(4285,2635) 4340,2635 4345.8,2640.8 U1.16
  Top Layer w10: v2(4000,3005) 4032.15,2972.85 4051.29,2972.85 4080,2944.14 4080,2720 4165,2635 v2(4285,2635)
  Bottom Layer w10: v2(4000,3005) 4000.61,3004.39 4000.61,2945.61 4000,2945 4001.22,2943.78 LCD1.7
NetLCD1_8: LCD1.8 U1.34 | length 1010.5
  Top Layer w8: U1.34 v2@4563.54,2883.9
  Bottom Layer w10: LCD1.8 3974.33,2934.49 3974.33,2855.67 v2(3975,2855) 3975,2785 3985.86,2774.14 4055.86,2774.14 4078.27,2796.56 4090.54,2796.56 4102.99,2809 4109,2809 4222.44,2922.43 4240,2922.43 4261,2943.43 4261,3027.01 4277.99,3044 4302.01,3044 4312.01,3034 4314.49,3034 4458.49,2890 v2@4575,2890
  other v2: 4575,2885
NetLCD1_11: LCD1.11 U1.13 | length 690.4
  Top Layer w8: 4217.8,2677.2 U1.13
  Top Layer w10: v2(4115,2780) 4217.8,2677.2
  Bottom Layer w10: LCD1.11 3890.49,2934.66 3890.49,2855.49 v2(3890,2855) 3890,2797.99 3875,2782.99 3875,2730.86 3880.86,2725 4035,2725 4086.56,2776.56 4111.56,2776.56 v2(4115,2780)
NetLED1_2: LED1.2 U2.2 | length 133.3
  Top Layer w10: LED1.2 3774.25,2049.25 3832.91,2049.25 3852.16,2030 U2.2 U2.2@3878.57,2027.59
NetLED2_2: LED2.2 U2.4 | length 357.8
  Top Layer w10: LED2.2 3595,1925 3605,1915 3865.98,1915 U2.4
NetP1_3: P1.3 U1.41 | length 443.8
  Top Layer w8: v2(4410,3000) 4424.53,2985.47 U1.41 ; v2(4575,2935) 4606.08,2903.92 4606.08,2881.81 4645.97,2841.92 4645.97,2804.03 P1.3
  Bottom Layer w8: v2(4410,3000) 4410,2965.36 4455.18,2920.18 4555.18,2920.18 4570,2935 v2(4575,2935)
NetP1_4: P1.4 U1.40 | length 450
  Top Layer w8: U1.40 v2@4444.21,3045 ; v2(4550,2975) 4625,2975 4650,2950 P1.4
  Bottom Layer w8: v2(4440,3045) 4440,2965 4450,2955 4525,2955 v2@4545,2975
NetQ1_1: Q1.1 R4.1 U1.39 | length 1207.5
  Top Layer w8: U1.39 4463.9,2988.9 v2(4475,3000)
  Top Layer w10: R4.1 3576.77,3042.04 3587.13,3052.4 Q1.1 3667.53,3052.4 3680.13,3065 v2(3685,3065)
  Bottom Layer w10: v2(3685,3065) 3685,3105 3785,3205 4315.67,3205 4347.52,3173.15 4352.86,3173.15 4475,3051.01 v2(4475,3000)
NetQ1_3: Q1.3 R3.2 | length 72.6
  Top Layer w10: Q1.3 3695.11,3016.48 3763.52,3016.48 R3.2
NetR5_1: R5.1 R6.1 R7.1 R10.2
NetR12_2: R12.2 U2.3 | length 115.1
  Top Layer w10: R12.2 3772.99,1980 U2.3
pads on no net: BOOT. CARD3. CARD3.1 CARD3.8 CARD3.9 EN. U1.5 U1.6 U1.7 U1.8 U1.10 U1.11 U1.12 U1.14 U1.15 U1.18 U1.24 U1.25 U1.26 U1.27 U1.28 U1.29 U1.30 U1.31 U1.32 U1.33 U1.35 U1.36 U1.38 U1.42 U1.44 U1.45 U1.47 U1.48 U2.9 U4.2
copper on no net:
  other v4: 3970.31,1985.31 4009.68,1985.31 3970.31,2024.68 4009.68,2024.68

## Polygon pours and split planes (outlines as drawn)
GND on Top Layer "Top Layer-GND 1" (solid, remove dead copper, pour order 27): 3699.99,3246.28 3699.99,3360 cw(c3705,3360) 3705,3365.01 3765,3365.01 cw(c3765,3360) 3770.01,3360 3770.01,3292.08 3782.08,3280.01 4217.92,3280.01 4229.98,3292.08 4229.98,3360 cw(c4235,3360) 4235,3365.01 4285,3365.01 cw(c4285,3360) 4290.02,3360 4290.02,3270.74 cw(c4025,2535) 4807.02,2535 cw(c4025,2535)
3.3V on Top Layer "Top Layer-3.3V" (solid, pour order 24): 3465,2305 3460,2310 3460,2600 3700,2600 3710,2590 3710,2585 3840,2585 3850,2575 3850,2550 3775,2550 3775,2305
3.3V on Top Layer "Top Layer-3.3V 1" (solid, pour order 22): 4190,2545 4190,2510 4205,2495 4575,2495 4575,2430 4575,2435 4225,2435 4225,2455 4155,2455 4150,2450 4150,2310 4010,2310 4000,2300 4000,2190 3950,2190 3945,2195 3945,2305 3665,2305 3665,2405 3670,2410 3920,2410 3925,2415 3925,2480 3935,2490 3985,2490 3985,2545
NetR5_1 on Top Layer "Top Layer-NetR5_1" (solid, pour order 18): 4045,2700 4045,2565 3975,2565 3970,2560 3970,2510 3965,2505 3920,2505 3920,2700
NetC17_2 on Top Layer "Top Layer-NetC17_2" (solid, pour order 10): 4720,2320 4720,2240 4695,2215 4695,2210 4520,2210 4520,2320
GND on Top Layer "Top Layer-GND" (solid, pour order 6): 4315,2155 4375,2155 4394.37,2135.63 4394.37,2065 4590,2065 4600,2075 4600,2190 4475,2190 4470,2195 4470,2255 4315,2255
+5.0V on Top Layer "Top Layer-+5.0V" (solid, pour order 4): 3840,2065 4030,2065 4030,2110 4210,2110 4215,2105 4215,2080 4220,2075 4305,2075 4305,2240 4075,2240 4070,2245 4070,2280 4030,2280 4020,2270 4020,2150 3845,2150 3840,2155
NetC14_1 on Top Layer "Top Layer-NetC14_1" (solid, pour order 2): 4380,2065 4575,2065 4575,2030 4565,2030 4480,1945 4425,1945 4385,1945 4380,1950
5V on Top Layer "Top Layer-5V" (solid, pour order 0): 3865,1890 3985,1890 3985,1780 3985,1785 3910,1785 3910,1815 3865,1815
GND on Bottom Layer "Bottom Layer-GND" (solid, remove dead copper, pour order 28): 3699.99,3246.28 3699.99,3360 cw(c3705,3360) 3705,3365.01 3765,3365.01 cw(c3765,3360) 3770.01,3360 3770.01,3292.08 3782.08,3280.01 4217.92,3280.01 4229.98,3292.08 4229.98,3360 cw(c4235,3360) 4235,3365.01 4285,3365.01 cw(c4285,3360) 4290.02,3360 4290.02,3270.74 cw(c4025,2535) 4807.02,2535 cw(c4025,2535)
3.3V on power (split plane): 3749.92,3292.08 3750.3,3288.16 3751.45,3284.39 3753.31,3280.91 3755.8,3277.87 3767.87,3265.8 3770.91,3263.31 3774.39,3261.45 3775.83,3261.01 3777.32,3260.21 3780.94,3258.71 3781.43,3258.57 3784.71,3257.57 3788.63,3257.18 4275.27,3257.18 4275.8,3256.53 4276.17,3256.23 4276.49,3255.88 4277.69,3254.98 4278.85,3254.03 4279.27,3253.81 4279.65,3253.53 4281,3252.88 4282.32,3252.17 4282.78,3252.04 4283.2,3251.83 4305.16,3243.92 4348.04,3225.44 4389.7,3204.37 4429.99,3180.79 4468.76,3154.79 4505.87,3126.46 4541.17,3095.92 4574.54,3063.27 4605.85,3028.64 4634.98,2992.16 4661.82,2953.96 4686.27,2914.19 4708.24,2873 4727.65,2830.54 4744.43,2786.97 4758.5,2742.46 4769.83,2697.17 4778.36,2651.27 4784.06,2604.94 4786.92,2558.34 4786.92,2535 4786.92,2507.79 4783.04,2453.51 4775.29,2399.64 4763.72,2346.46 4748.39,2294.24 4729.38,2243.26 4706.77,2193.75 4680.69,2145.99 4651.27,2100.2 4618.66,2056.64 4583.02,2015.51 4544.54,1977.02 4503.41,1941.38 4459.85,1908.77 4414.07,1879.34 4366.3,1853.26 4316.8,1830.65 4265.81,1811.63 4213.6,1796.29 4160.42,1784.72 4106.55,1776.97 4052.27,1773.08 3997.85,1773.08 3943.57,1776.96 3889.7,1784.7 3836.52,1796.26 3784.3,1811.59 3733.31,1830.6 3683.81,1853.2 3636.04,1879.28 3590.25,1908.7 3546.68,1941.31 3505.55,1976.94 3467.06,2015.42 3431.42,2056.54 3398.8,2100.1 3369.37,2145.88 3343.29,2193.64 3320.67,2243.14 3301.65,2294.13 3286.31,2346.34 3274.73,2399.52 3266.98,2453.39 3263.09,2507.67 3263.08,2562.09 3266.95,2616.37 3274.69,2670.24 3286.25,2723.42 3301.57,2775.64 3320.58,2826.63 3343.18,2876.14 3369.25,2923.91 3398.66,2969.7 3431.27,3013.27 3466.9,3054.4 3505.37,3092.89 3546.49,3128.54 3590.05,3161.16 3635.83,3190.6 3683.59,3216.69 3708.34,3228 3709.73,3228.81 3711.15,3229.57 3711.43,3229.8 3711.74,3229.98 3712.95,3231.04 3714.2,3232.06 3714.43,3232.34 3714.7,3232.58 3715.67,3233.86 3716.69,3235.11 3716.87,3235.43 3717.09,3235.72 3717.79,3237.17 3718.55,3238.58 3718.66,3238.93 3718.82,3239.26 3719.23,3240.82 3719.7,3242.35 3719.73,3242.71 3719.82,3243.06 3719.92,3244.67 3720.08,3246.28 3720.08,3344.92 3749.92,3344.92
3.3V on power (split plane): 4269.92,3317.06 4250.08,3317.06 4250.08,3344.92 4269.92,3344.92
GND on GND (split plane): 3749.92,3292.08 3750.3,3288.16 3751.45,3284.39 3753.31,3280.91 3755.8,3277.87 3767.87,3265.8 3770.91,3263.31 3774.39,3261.45 3775.83,3261.01 3777.32,3260.21 3780.94,3258.71 3781.43,3258.57 3784.71,3257.57 3788.63,3257.18 4275.27,3257.18 4275.8,3256.53 4276.17,3256.23 4276.49,3255.88 4277.69,3254.98 4278.85,3254.03 4279.27,3253.81 4279.65,3253.53 4281,3252.88 4282.32,3252.17 4282.78,3252.04 4283.2,3251.83 4305.16,3243.92 4348.04,3225.44 4389.7,3204.37 4429.99,3180.79 4468.76,3154.79 4505.87,3126.46 4541.17,3095.92 4574.54,3063.27 4605.85,3028.64 4634.98,2992.16 4661.82,2953.96 4686.27,2914.19 4708.24,2873 4727.65,2830.54 4744.43,2786.97 4758.5,2742.46 4769.83,2697.17 4778.36,2651.27 4784.06,2604.94 4786.92,2558.34 4786.92,2535 4786.92,2507.79 4783.04,2453.51 4775.29,2399.64 4763.72,2346.46 4748.39,2294.24 4729.38,2243.26 4706.77,2193.75 4680.69,2145.99 4651.27,2100.2 4618.66,2056.64 4583.02,2015.51 4544.54,1977.02 4503.41,1941.38 4459.85,1908.77 4414.07,1879.34 4366.3,1853.26 4316.8,1830.65 4265.81,1811.63 4213.6,1796.29 4160.42,1784.72 4106.55,1776.97 4052.27,1773.08 3997.85,1773.08 3943.57,1776.96 3889.7,1784.7 3836.52,1796.26 3784.3,1811.59 3733.31,1830.6 3683.81,1853.2 3636.04,1879.28 3590.25,1908.7 3546.68,1941.31 3505.55,1976.94 3467.06,2015.42 3431.42,2056.54 3398.8,2100.1 3369.37,2145.88 3343.29,2193.64 3320.67,2243.14 3301.65,2294.13 3286.31,2346.34 3274.73,2399.52 3266.98,2453.39 3263.09,2507.67 3263.08,2562.09 3266.95,2616.37 3274.69,2670.24 3286.25,2723.42 3301.57,2775.64 3320.58,2826.63 3343.18,2876.14 3369.25,2923.91 3398.66,2969.7 3431.27,3013.27 3466.9,3054.4 3505.37,3092.89 3546.49,3128.54 3590.05,3161.16 3635.83,3190.6 3683.59,3216.69 3708.34,3228 3709.73,3228.81 3711.15,3229.57 3711.43,3229.8 3711.74,3229.98 3712.95,3231.04 3714.2,3232.06 3714.43,3232.34 3714.7,3232.58 3715.67,3233.86 3716.69,3235.11 3716.87,3235.43 3717.09,3235.72 3717.79,3237.17 3718.55,3238.58 3718.66,3238.93 3718.82,3239.26 3719.23,3240.82 3719.7,3242.35 3719.73,3242.71 3719.82,3243.06 3719.92,3244.67 3720.08,3246.28 3720.08,3344.92 3749.92,3344.92
GND on GND (split plane): 4269.92,3317.06 4250.08,3317.06 4250.08,3344.92 4269.92,3344.92

## Keep-outs
Keep-Out Layer:
  lines w10: 3705,3245 3705,3360 3765,3360 3765,3290 3780,3275 4220,3275 4235,3290 4235,3360 4285,3360 4285,3270 ; 3705.73,3243.38 ccw(c4025,2535) 4285.7,3266.96

## Other copper
Top Layer:
  pour cut-out: 4354.19,2070.32 4365.97,2070.32 4365.97,2069.21 4369.9,2065.28 4369.9,1981.15 4372.79,1978.26 4355,1960.47 4355,2069.51
  pour cut-out: 4220.73,2059.49 4222.41,2061.17 4222.41,2065.99 4227.06,2065.99 4231.38,2070.32 4231.94,2070.32 4236.63,2075 4262.5,2075 4262.5,2074.93 4271.85,2065.58 4274.06,2067.79 4312.21,2067.79 4312.21,2068.89 4315,2071.68 4315,2130 4323.94,2130 4324.25,2129.68 4323.6,2129.04 4323.6,2059.49 4220.73,2059.49 4219.86,2060.35 4219.86,2063.45 4224.81,2068.4 4230.02,2068.4 4231.94,2070.32
  pour cut-out: 3894.21,2499.37 3895.73,2500.89 3895.73,2504.37 3930.36,2504.37 3931.1,2503.63 3931.1,2499.42 3930,2499.42 3914.8,2484.22 3914.8,2422.05 3912.95,2420.2 3887.97,2420.2 3883.7,2424.47 3867.5,2424.47 3863.22,2420.2 3855.32,2420.2 3855.32,2463.67 3855.25,2463.74 3864.29,2463.74 3872.5,2455.53 3890.14,2455.53 3902.61,2468 3902.61,2489.36 3894.21,2497.76 3894.21,2502.85 3895.73,2504.37
  pour cut-out: 4171.54,2615.09 4173.46,2617 4173.46,2619.71 4265.69,2619.71 4273,2612.39 4297,2612.39 4305.33,2620.73 4344.5,2620.73 4345.54,2621.76 4348.35,2618.95 4350.18,2618.95 4350.18,2603.51 4343.97,2597.3 4337.7,2597.3 4337.7,2587.17 4330.53,2580 4332.39,2578.14 4332.39,2570.64 4334.64,2568.39 4334.64,2559.19 4227.44,2559.19 4171.54,2615.09 4171.54,2617.79 4173.46,2619.71
  pour cut-out: 4204.82,2538.56 4202.11,2538.56 4200.2,2536.64 4200.2,2514.22 4209.42,2505 4510,2505 4510.29,2505.29 4510.29,2557.65 4481.24,2528.6 4221.11,2528.6 4211.15,2538.56 4202.11,2538.56 4200.2,2536.64
  pour cut-out: 4055.2,2681.64 4057.9,2681.64 4059.82,2683.56 4183.56,2559.82 4183.56,2557.11 4181.64,2555.2 4052.05,2555.2 4052.05,2557.95 4045,2565 4045,2559.53 4047.72,2556.81 4055.2,2564.29
Bottom Layer:
  pour cut-out: 4490.29,2542.05 4492.36,2544.12 4495.29,2544.12 4510.73,2528.69 4510.73,2477.7 4500.53,2467.5 4500.53,2452.5 4507.7,2445.33 4507.7,2442.7 4492.3,2442.7 4490,2445 4490.29,2445.29

## Silkscreen, mask and mechanical layers (free items; w line width, h text height)
Bottom Overlay:
  drawing of 2252 lines, arcs and shapes, not listed
Mechanical 1:
  the board outline again, w20

## Text inside footprints (layer, text, board x,y; h text height)
LCD1: Top Overlay "12" at 3850,2990 h25; Top Overlay "1" at 4218.54,3057.44 h25 r180